# Altium PCB CH32V00x_Touch_Kit.PcbDoc
Units mil, origin at the board's own origin, x right, y up, seen from the top; angles counter-clockwise.
Board outline 2598.43 x 2007.87 mil, 2 copper layers (Top Layer, Bottom Layer); 37 components, 40 nets, 148 pads, 271 vias.
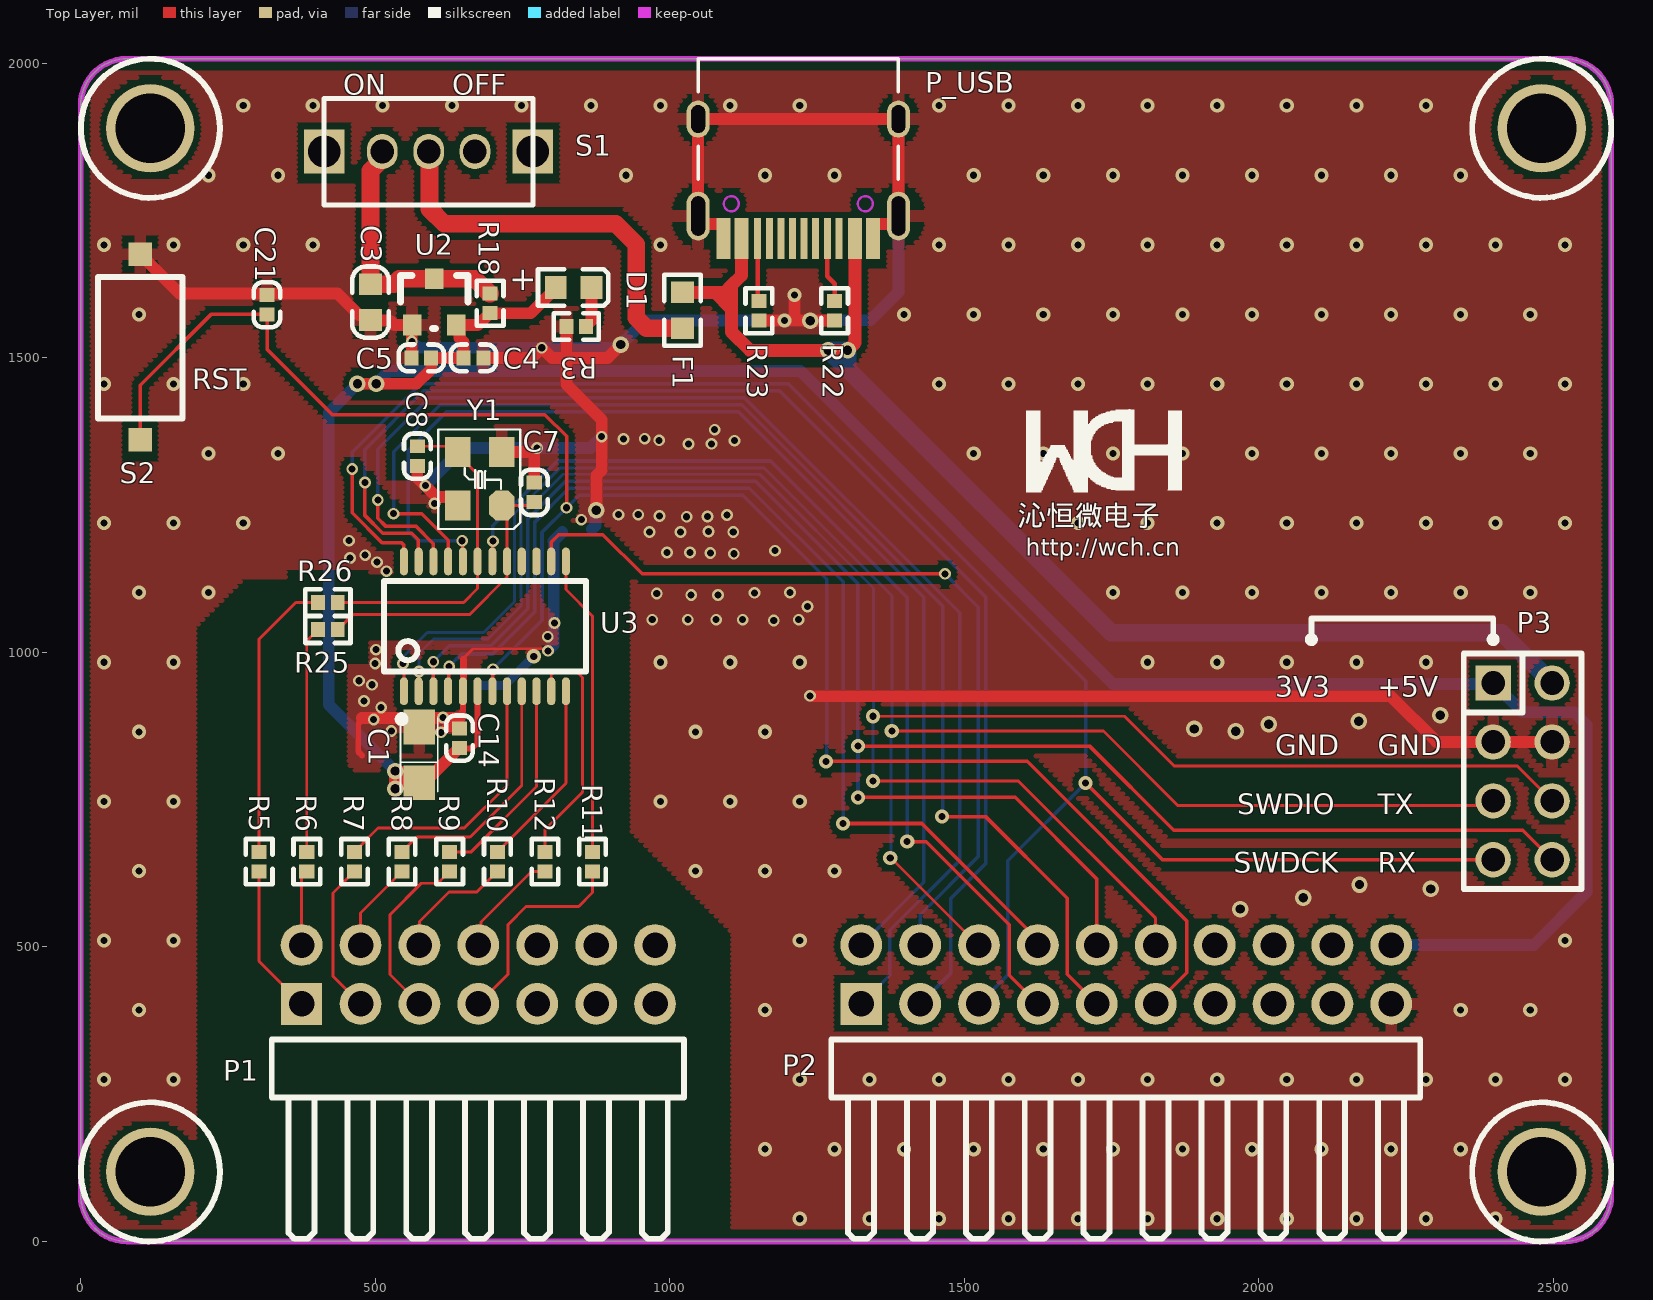
[diagram p0: Top Layer view]
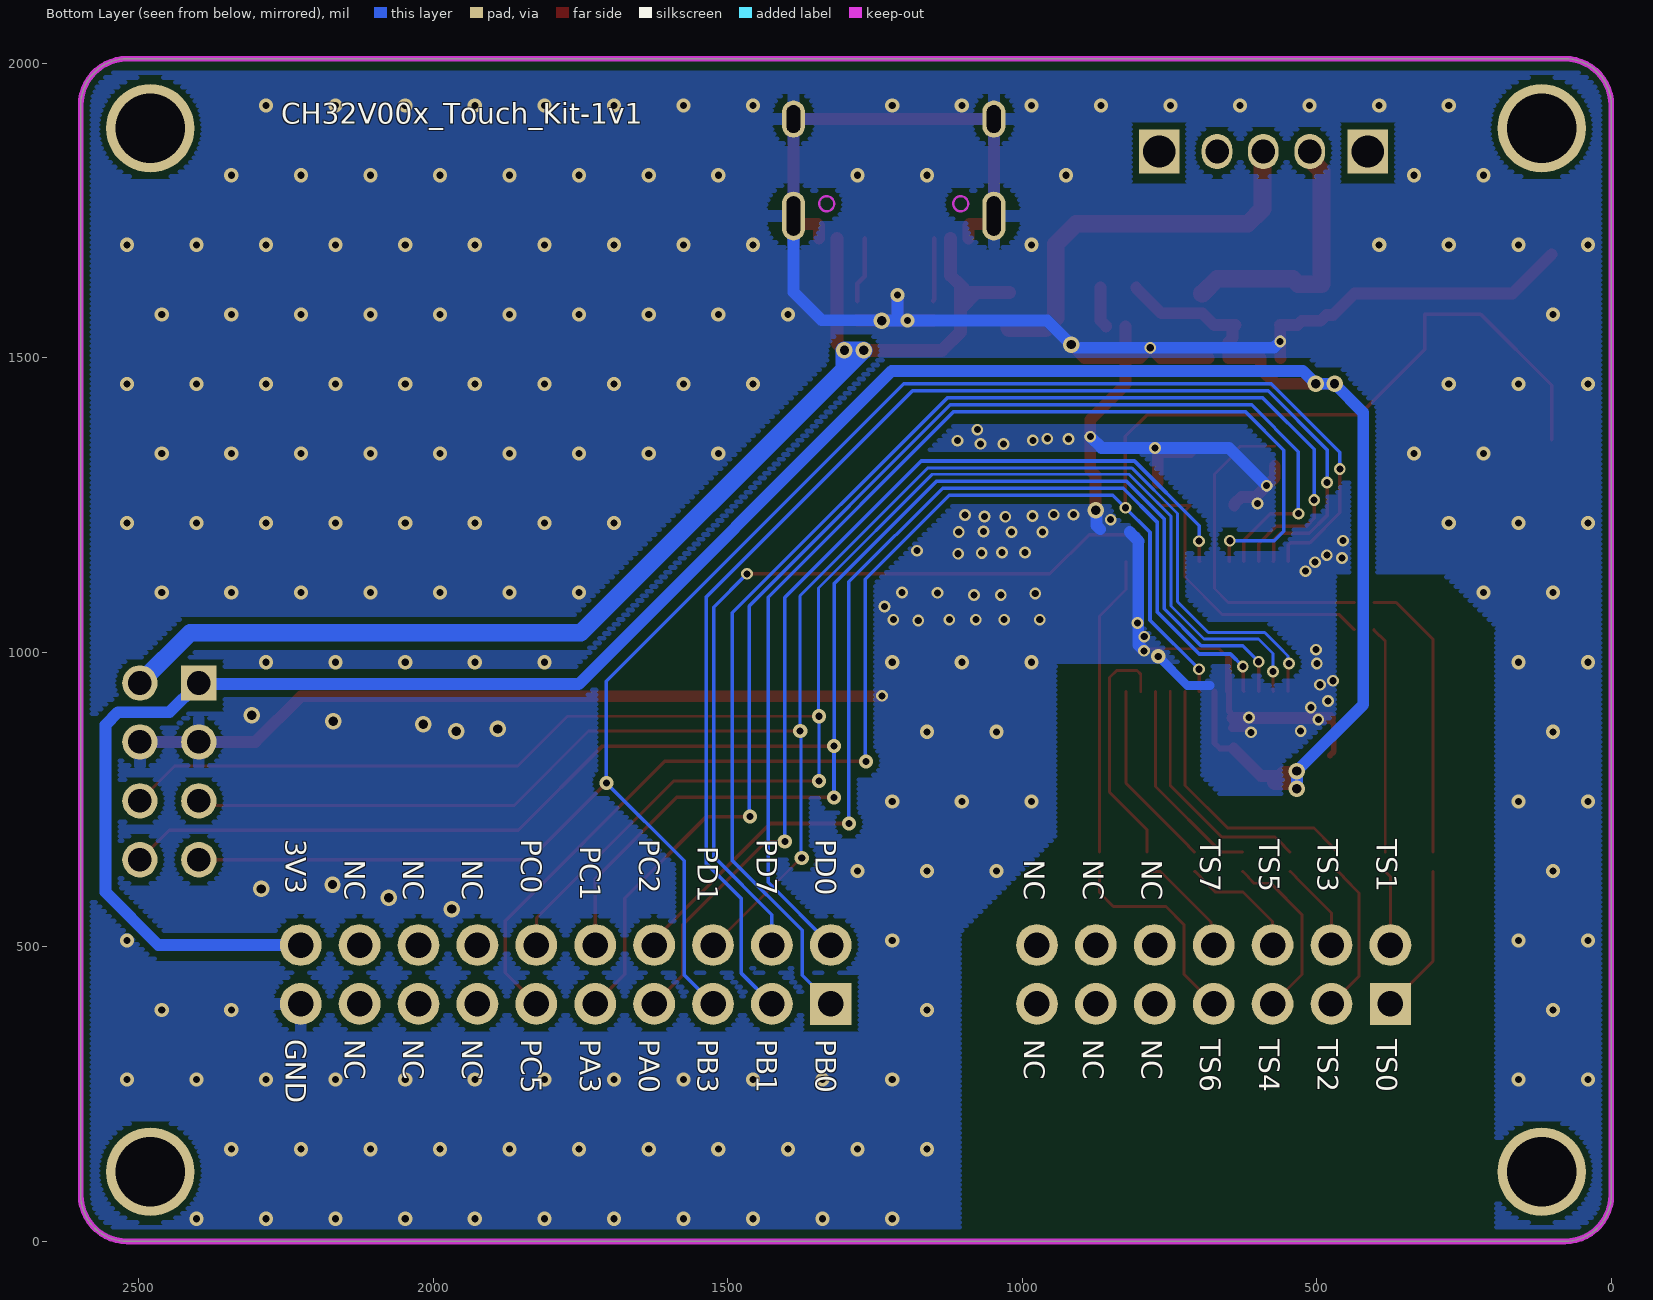
[diagram p1: Bottom Layer view, seen from below]

## Layer stack, top to bottom
Top Solder: solder mask 0.4, Solder Resist, Dk 3.5
Top Layer: signal copper 1.4
Dielectric 1: dielectric 12.6, FR-4, Dk 4.8
Bottom Layer: signal copper 1.4
Bottom Solder: solder mask 0.4, Solder Resist, Dk 3.5

## Board outline
0,78.74 ccw(c78.74,78.74) 78.74,0 2519.69,0 ccw(c2519.69,78.74) 2598.43,78.74 2598.43,1929.13 ccw(c2519.69,1929.13) 2519.69,2007.87 78.74,2007.87 ccw(c78.74,1929.13) 0,1929.13

## Design rules (kind name [scope] priority, off if disabled: settings)
Clearance Clearance_2 [InNetClass('Net Class1') vs InPolygon] p1: gap=39.37 ignorepadtopadclearanceinfootprint=FALSE
Clearance Clearance_1 [InPolygon] p2: gap=10 ignorepadtopadclearanceinfootprint=FALSE
Clearance [All] p3: gap=6 ignorepadtopadclearanceinfootprint=FALSE except(8: Arc-Via Track-Via SMDPad-Via THPad-Via Via-Via Via-Fill Via-Poly Via-Region Via-Hole)
ComponentClearance [All] p1 off: gap=10 collisioncheckmode=3 verticalgap=10 showdistances=FALSE
DiffPairsRouting [All] p1: maxlimit=10 minlimit=7 mostfreqgap=8 toplayer_minwidth=6 toplayer_maxwidth=15 toplayer_prefwidth=8 bottomlayer_minwidth=6 bottomlayer_maxwidth=15 bottomlayer_prefwidth=8 maxuncoupledlength=500
MinimumSolderMaskSliver [All] p1 off: minsoldermaskwidth=10
PolygonConnect PolygonConnect_1 [IsVia] p1: connectstyle=Direct reliefconductorwidth=10 reliefentries=4 polygonreliefangle="90 Angle" airgapwidth=10
PolygonConnect [All] p2: connectstyle=Relief reliefconductorwidth=20 reliefentries=4 polygonreliefangle="90 Angle" airgapwidth=10
RoutingVias [All] p1: holewidth=16 width=28 viastyle="Through Hole" minholewidth=12 minwidth=20 maxholewidth=28 maxwidth=50
SilkToSilkClearance [All] p1 off: silktosilkclearance=10
SilkToSolderMaskClearance [IsPad] p1 off: minsilkscreentomaskgap=10 clearancetoexposedcopper=TRUE
SolderMaskExpansion [All] p1: expansion=2 istentingtop=FALSE
Width [All] p1: maxlimit=100 minlimit=5 preferedwidth=10
25 further rules are at their usual default settings.

## Classes and differential pairs
net class "Net Class1": PA1 PA2 PC4 PD2 PD3 PD4 PD5 PD6 TS0 TS1 TS2 TS3 TS4 TS5 TS6 TS7 XI XO
component class CH32V00x_Touch_Kit-1v1: C1 C3 C4 C5 C7 C8 C14 C21 D1 F1 P1 P2 P3 P_USB R3 R5 R6 R7 R8 R9 R10 R11 R12 R18 R22 R23 R25 R26 S1 S2 U2 U3 Y1

## Components (designator, comment, footprint, x,y, rotation, side; value= is the part's Value field where it differs from the comment)
C1 "10uF" CASE-A_3216 574.64,826.05 r90 top
C3 "10uF" 0603_C 492,1625 r270 top
C4 "2.2uF" 0402_C 650,1500 r90 top
C5 "0.1uF" 0402_C 595,1500 r270 top
C7 "NC(22pF)" 0402_C 770,1288.46 r0 top
C8 "NC(22pF)" 0402_C 571.38,1316.54 r180 top
C14 "0.1uF" 0402_C 643.04,871.13 r0 top value=15pF
C21 "0.1uF" 0402_C 316.22,1606.93 r0 top
D1 "power" 0603+ 806.48,1619.59 r0 top
F1 "500mA" 0603 1021.64,1611.07 r270 top
P1 "Header 7X2" HDR-TH_14P-P2.54-H-M-R2-C10-S2.54 375,403.22 r0 top
P2 "Header 10X2" HDR-TH_20P-P2.54-H-M-R2-C10-S2.54 1775,453.22 r0 top
P3 "Header 4X2" IDC8-2.54mm 2397.99,947.99 r0 top
P_USB "TYPE-C" TYPE-C-Receptacle-2.0 1218.24,1702.67 r180 top
R3 "1K" 0402 857.98,1553.27 r180 top
R5 "0Ω(560Ω)" 0402 302.87,661.46 r270 top
R6 "0Ω(560Ω)" 0402 383.74,628 r90 top
R7 "0Ω(560Ω)" 0402 464.62,661.46 r270 top
R8 "0Ω(560Ω)" 0402 545.5,628 r90 top
R9 "0Ω(560Ω)" 0402 626.37,661.46 r270 top
R10 "0Ω(560Ω)" 0402 707.25,628 r90 top
R11 "0Ω(560Ω)" 0402 869,661.46 r270 top
R12 "0Ω(560Ω)" 0402 788.12,628 r90 top
R18 "NC(0R)" 0402 695,1575.94 r90 top
R22 "5.1K" 0402 1280,1596.74 r270 top
R23 "5.1K" 0402 1151.24,1596.74 r270 top
R25 "0R" 0402 436.27,1038.57 r180 top
R26 "0R" 0402 436.27,1084.66 r180 top
S1 "SW SPDT" SW1 590.55,1850.39 r0 top
S2 "RST" SMD_6.1x3.65x2.5mm-KEY 100.98,1675.94 r270 top
U2 "6219P33M" SOT-23 600,1595 r0 top
U3 "CH32V006E8R6" QSOP24 548.76,933.91 r0 top
Y1 "NC(24MHz)" XT3225 714.8,1249.45 r90 top
? "Comment" HOLE 118.11,118.11 r0 top
? "Comment" HOLE 2480.31,118.11 r0 top
? "Comment" HOLE 2480.31,1889.76 r0 top
? "Comment" HOLE 118.11,1889.76 r0 top

## Footprints (in the part's own frame and the unit in brackets; to place one, negate y for a bottom-side part, rotate by r counter-clockwise, add the part's x,y. Pads: shape width x height; smd on the part's side, far side on the other; paste and mask are expansions set on the pad)
0402 [mm]
  rect 0.6x0.65 smd mask+0.051: 1(0,0) 2(0.85,0)
  silkscreen extent -0.55,-0.58 1.4,0.57
0402_C [mm]
  rect 0.65x0.6 smd mask+0.051: 1(0,0) 2(0,-0.85)
  silkscreen extent -0.58,-1.4 0.57,0.55
0603 [mm]
  rect 0.93x0.98 smd: 1(0,0) 2(1.54,0)
  silkscreen extent -0.76,-0.79 2.3,0.79
0603+ [mm]
  rect 0.93x0.98 smd: 1(0,0) 2(1.54,0)
  silkscreen extent -0.76,-0.79 2.27,0.79
0603_C [mm]
  rect 0.93x0.98 smd mask+0.051: 1(0,0) 2(1.54,0)
  silkscreen extent -0.76,-0.79 2.31,0.79
CASE-A_3216 [mil]
  rect 59.05x53.5 smd: 1(-47.24,0) 2(47.24,0)
  silkscreen extent -63,-32 63,32
HDR-TH_14P-P2.54-H-M-R2-C10-S2.54 [mm]
  rect 1.778x1.8 hole 1.1: 1(0,0)
  round 1.8 hole 1.1: 2(0,2.54) 3(2.54,0) 4(2.54,2.54) 5(5.08,0) 6(5.08,2.54) 7(7.62,0) 8(7.62,2.54) 9(10.16,0) 10(10.16,2.54) 11(12.7,0) 12(12.7,2.54) 13(15.24,0) 14(15.24,2.54)
  silkscreen extent -1.29,-10.13 16.49,-1.54
HDR-TH_20P-P2.54-H-M-R2-C10-S2.54 [mm]
  rect 1.778x1.8 hole 1.1: 1(-11.43,-1.27)
  round 1.8 hole 1.1: 2(-11.43,1.27) 3(-8.89,-1.27) 4(-8.89,1.27) 5(-6.35,-1.27) 6(-6.35,1.27) 7(-3.81,-1.27) 8(-3.81,1.27) 9(-1.27,-1.27) 10(-1.27,1.27) 11(1.27,-1.27) 12(1.27,1.27) 13(3.81,-1.27) 14(3.81,1.27) 15(6.35,-1.27) 16(6.35,1.27) 17(8.89,-1.27) 18(8.89,1.27) 19(11.43,-1.27) 20(11.43,1.27)
  silkscreen extent -12.72,-11.4 12.68,-2.81
HOLE [mm]
  round 3.81 hole 3: 0(0,0)
  silkscreen extent -3,-3 3,3
IDC8-2.54mm [mil]
  rect 60x60 hole 40: 1(0,0)
  round 60 hole 40: 2(100,0) 3(0,-100) 4(100,-100) 5(0,-200) 6(100,-200) 7(0,-300) 8(100,-300)
  silkscreen extent -50,-350 150,50
QSOP24 [mm]
  oval 0.35x1.2 smd mask+0.051: 1(0,0) 2(0.635,0) 3(1.27,0) 4(1.905,0) 5(2.54,0) 6(3.175,0) 7(3.81,0) 8(4.445,0) 9(5.08,0) 10(5.715,0) 11(6.35,0) 12(6.985,0) 13(6.985,5.6) 14(6.35,5.6) 15(5.715,5.6) 16(5.08,5.6) 17(4.445,5.6) 18(3.81,5.6) 19(3.175,5.6) 20(2.54,5.6) 21(1.905,5.6) 22(1.27,5.6) 23(0.635,5.6) 24(0,5.6)
  silkscreen extent -0.86,-1.35 7.84,4.75
SMD_6.1x3.65x2.5mm-KEY [mm]
  rect 1x1 smd: 1(0,0) 2(8,0)
  silkscreen extent 0.98,-1.83 7.08,1.83
SOT-23 [mm]
  rect 0.8x0.9 smd: 1(-0.95,-1) 2(0.95,-1) 3(0,1)
  silkscreen extent -1.46,-1.14 1.46,1.15
SW1 [mm]
  rect 1.75x1.9 hole 1.4: 0(-4.5,0) 0(4.5,0)
  oval 1.321x1.524 hole 1.016: 1(0,0) 2(-2,0) 3(2,0)
  silkscreen extent -4.51,-2.31 4.5,2.29
TYPE-C-Receptacle-2.0 [mm]
  oval 1x2.1 hole 0.6 slot 1.7 at 90 deg: 0(-4.32,-0.97) 0(4.32,-0.97)
  oval 1x1.6 hole 0.6 slot 1.2 at 90 deg: 0(-4.32,-5.15) 0(4.32,-5.15)
  rect 0.6x1.75 smd mask+0.051: A1(-3.225,0) A4(-2.45,0) B1(3.225,0) B4(2.45,0)
  rect 0.3x1.75 smd mask+0.051: A5(-1.25,0) A6(-0.25,0) A7(0.25,0) A8(1.25,0) B5(1.75,0) B6(0.75,0) B7(-0.75,0) B8(-1.75,0)
  Keep-Out Layer circle w0.1: c-2.89,-1.5 r0.325
  Keep-Out Layer circle w0.1: c2.89,-1.5 r0.325
  silkscreen extent -4.32,-7.75 4.32,-2.55
XT3225 [mm]
  oct 1.3x1.1 smd: 1(0,0)
  rect 1.3x1.1 smd: 2(2.3,0) 3(2.3,1.9) 4(0,1.9)
  silkscreen extent -1.02,-0.8 3.27,2.74

## Part data
C1: library part T-A/4.7uF/16V
C3 C4 C5 C7 C8 C21: library part CAP, "Capacitor"
C14: library part Cap, "Capacitor", LatestRevisionDate=17-Jul-2002, LatestRevisionNote="Re-released for DXP Platform.", PackageReference=RAD-0.3, Published=8-Jun-2000, Publisher="Altium Limited"
D1: library part LED0, "Typical INFRARED GaAs LED", LatestRevisionDate=08-Jul-2005, LatestRevisionNote="Mech Layer 1 removed.", PackageDescription="LED; 2 Leads", PackageReference=LED-0, Published=8-Jun-2000, Publisher="Altium Limited"
F1: library part FUSE1, "Fuse"
P1: "Header, 7-Pin, Dual row", LatestRevisionDate=17-Jul-2002, LatestRevisionNote="Re-released for DXP Platform.", Publisher="Altium Limited"
P2: "Header, 10-Pin, Dual row", LatestRevisionDate=17-Jul-2002, LatestRevisionNote="Re-released for DXP Platform.", Publisher="Altium Limited"
P3: "Header, 4-Pin, Dual row", LatestRevisionDate=17-Jul-2002, LatestRevisionNote="Re-released for DXP Platform.", Publisher="Altium Limited"
P_USB: library part TYPE-C1
R3 R5 R6 R7 R8 R9 R10 R11 R12: library part RES
R18 R22 R23: library part Res2, "Resistor"
  R18: LatestRevisionDate=17-Jul-2002, LatestRevisionNote="Re-released for DXP Platform.", PackageReference=AXIAL-0.4, Published=8-Jun-2000, Publisher="Altium Limited"
R25 R26: library part "Res Semi", "Semiconductor Resistor", LatestRevisionDate=17-Jul-2002, LatestRevisionNote="Re-released for DXP Platform.", PackageReference=AXIAL-0.5, Published=8-Jun-2000, Publisher="Altium Limited"
S2: library part SW-PB, "Switch", LatestRevisionDate=17-Jul-2002, LatestRevisionNote="Re-released for DXP Platform.", PackageDescription="Switch; 2 Leads", PackageReference=SPST-2, Published=24-Mar-1999, Publisher="Altium Limited"
U3: "RISC-V MCU, 48MHz, ADC/OPA/CMP/2*UART/I2C/SPI"
Y1: library part XTAL, "Crystal Oscillator", LatestRevisionDate=17-Jul-2002, LatestRevisionNote="Re-released for DXP Platform.", PackageDescription="Crystal, Thru-Hole; 2 Leads; Body 3.1 x 8.2 mm (Dia.xH)", PackageReference=R38, Published=8-Jun-2000, Publisher="Altium Limited"

## Via types
v1: diameter 24, hole 12, Top Layer to Bottom Layer, tented both sides, 180 vias
v2: diameter 20, hole 12, Top Layer to Bottom Layer, tented both sides, 73 vias
v3: diameter 28, hole 16, Top Layer to Bottom Layer, tented both sides, 18 vias

## Nets (pads, with @x,y where several pads share a name; then routed paths per layer and width w, separated by ;. In a path a pad name is that pad's centre, name@x,y a point inside that pad or via, vN(x,y) a via of type N, cw(c..) or ccw(c..) an arc to the next point about the centre after c; other vN are vias at no path point)
3V3: C1.1 C4.1 C5.1 C14.2 D1.1 P2.20 P3.1 R18.1 U2.2 U3.6 | length 4586
  Top Layer w10: C14.2@634.76,836.68 641.07,836.68 664.26,836.68 673.76,846.18 U3.6
  Top Layer w20: v3(469.85,1455.94) 569.98,1455.94 595,1480.96 C5.1 C4.1 650,1526.8 643.15,1533.65 643.15,1549.88 U2.2 673.7,1555.63 694.02,1575.94 R18.1 763.82,1575.94 806.48,1618.6 D1.1 ; v3(533.67,798.63) 535.2,797.1 557.89,797.1 564.06,790.93 C1.1@564.06,790.07 ; v3@535.2,777.04 v3@533.67,775.51 ; C1.1 571.87,776.04 535.2,776.04 533.67,774.51 v3@533.67,775.51 ; C14.2@641.07,836.68 594.46,790.07 C1.1@564.06,790.07 ; v3@533.67,775.51 533.67,790.07 C1.1@564.06,790.07
  Bottom Layer w20: v3(533.67,768.51) v3(533.67,798.63) 420.99,911.32 420.99,1407.07 v3(469.85,1455.94) 470.18,1456.27 501.48,1456.27 v3(501.88,1455.87) 523.92,1477.91 1221.59,1477.91 1753.19,946.31 P3.1@2399.68,946.31 ; P2.20 2466.75,503.22 2556.29,592.77 2556.29,877.32 2535.39,898.23 2447.76,898.23 P3.1@2399.68,946.31 ; P3.1 P3.1@2399.68,946.31 ; P3.1@2412.5,946.31 P3.1@2399.68,946.31
+5V: F1.1 P3.2 P_USB.A4 P_USB.B4 | length 2223.9
  Top Layer w22: F1.1 1077.09,1611.07 ; P_USB.B4 1121.78,1639.92 1104.62,1622.76 ; P_USB.A4 1314.69,1525.71 v3(1301.81,1512.83) 1136.11,1512.83 1104.62,1544.32 1104.62,1583.54 ; 1077.09,1611.07 1092.93,1611.07 1104.62,1622.76 ; 1077.09,1611.07 1104.62,1583.54 ; 1104.62,1583.54 1104.62,1622.76
  Bottom Layer w30: v3@1269.43,1512.51 v3@1270.08,1512.51 ; P3.2 2412.73,1033.26 1749.33,1033.26 1316.97,1465.62 1301.81,1480.79 ; v3@1270.08,1512.51 1301.81,1480.79 ; v3@1270.08,1512.51 1301.49,1512.51 v3(1301.81,1512.83) 1301.81,1480.79
  other v3: 1269.43,1512.83
GND: C1.2 C3.2 C4.2 C5.2 C7.1 C8.1 C14.1 C21.1 P2.19 P3.3 P3.4 P_USB.0 P_USB.A1 P_USB.B1 R3.2 R22.2 R23.2 S2.1 U2.1 U3.5 Y1.2 Y1.4 | length 5936.4
  Top Layer w5: 648.76,989.1 665.83,1006.17 792.83,1006.17 v2@794.34,1004.66
  Top Layer w10: 477.09,884.52 471.23,878.67 471.23,831.53 477.76,825 ; 620.4,871.13 620.4,871.62 ; C14.1 643.04,894.18 648.76,899.9 U3.5
  Top Layer w12: U3.5@649.76,933.91 649.76,989.1
  Top Layer w15: 620.4,872.13 C14.1@643.04,872.13
  Top Layer w20: S2.1 167.52,1609.41 435.83,1609.41 472.56,1572.68 483.69,1572.68 493.18,1563.19 525.29,1563.19 532.85,1555.63 U2.1 562.07,1555.1 v2(562.07,1527.82) 562.07,1500.53 C5.2 ; 477.09,888.52 643.04,888.52 ; C8.1 571.38,1296.79 604.53,1263.65 628.35,1263.65 640,1251.99 Y1.4 ; C4.2 765.53,1500 v2(782.71,1517.17) 799.88,1500 820.33,1500 ; Y1.2 767.55,1340 v2@770,1342.45 ; C7.1 v2@770,1342.45 ; v2(774.63,1347.09) v2@770,1342.45 ; R3.2 824.52,1504.19 820.33,1500 ; v3(875.42,1241.34) 875.42,1300.32 884.48,1309.38 v2(884.48,1366.19) 884.48,1395.14 824.52,1455.11 824.52,1500 ; v3(917.12,1522.7) 894.41,1500 824.52,1500 ; P_USB.B1 1091.27,1725.31 1089.46,1727.12 1057.11,1727.12 1048.16,1736.07 1048.16,1740.86 1048.16,1905.43 1388.32,1905.43 1388.32,1740.86 1388.32,1736.07 1379.37,1727.12 1347.02,1727.12 1345.2,1725.31 P_USB.A1 ; R23.2 v1(1194.86,1563.28) 1214.17,1563.28 ; v1(1211.91,1606.61) 1211.91,1565.54 1214.17,1563.28 ; v2(1238.25,926.22) 1239.03,925.43 2224.35,925.43 2301.79,847.99 P3.3 P3.4 ; R22.2 v3(1238.47,1563.28) 1214.17,1563.28 ; 820.33,1500 824.52,1500
  Bottom Layer w15: 681.41,943.78 719.55,943.78 v1(769.13,993.36)
  Bottom Layer w20: v2(562.07,1527.82) 572.71,1517.17 909.42,1517.17 914.95,1522.7 v3(917.12,1522.7) 957.69,1563.28 v1(1194.86,1563.28) 1216.66,1563.28 ; v2(585.07,1283.1) 585.16,1283.1 649.15,1347.09 v2(774.63,1347.09) 865.37,1347.09 v2(884.48,1366.19) ; v2@794.34,1004.66 802.1,1012.41 ; 802.1,1188.76 817.57,1204.23 ; 803.1,1012.41 803.1,1188.76 ; 867.66,1209.02 873.89,1215.25 873.89,1239.81 v3(875.42,1241.34) ; v1(1211.91,1606.61) 1211.91,1568.03 1216.66,1563.28 ; P_USB.0@1388.32,1740.86 1388.32,1611.35 1340.78,1563.81 1239.01,1563.81 v3(1238.47,1563.28) 1216.66,1563.28
  other v1: 1220.75,38.42 1338.86,38.42 1456.97,38.42 1575.08,38.42 1693.19,38.42 1811.3,38.42 1929.41,38.42 2047.52,38.42 2165.63,38.42 2283.74,38.42 2401.85,38.42 1161.69,156.53 1279.8,156.53 1397.91,156.53 1516.02,156.53 1634.13,156.53 1752.24,156.53 1870.35,156.53 1988.46,156.53 2106.57,156.53 2224.68,156.53 2342.79,156.53 39.64,274.64 157.76,274.64 1220.75,274.64 1338.86,274.64 1456.97,274.64 1575.08,274.64 1693.19,274.64 1811.3,274.64 1929.41,274.64 2047.52,274.64 2165.63,274.64 2283.74,274.64 2401.85,274.64 2519.96,274.64 98.7,392.76 1161.69,392.76 2342.79,392.76 2460.9,392.76 39.64,510.87 157.76,510.87 1220.75,510.87 2519.96,510.87 98.7,628.98 1043.58,628.98 1161.69,628.98 1279.8,628.98 39.64,747.09 157.76,747.09 984.53,747.09 1102.64,747.09 1220.75,747.09 98.7,865.2 1043.58,865.2 1161.69,865.2 39.64,983.31 157.76,983.31 984.53,983.31 1102.64,983.31 1220.75,983.31 1811.3,983.31 1929.41,983.31 2047.52,983.31 2165.63,983.31 2283.74,983.31 98.7,1101.42 216.81,1101.42 1752.24,1101.42 1870.35,1101.42 1988.46,1101.42 2106.57,1101.42 2224.68,1101.42 2342.79,1101.42 2460.9,1101.42 39.64,1219.53 157.76,1219.53 275.87,1219.53 1693.19,1219.53 1811.3,1219.53 1929.41,1219.53 2047.52,1219.53 2165.63,1219.53 2283.74,1219.53 2401.85,1219.53 2519.96,1219.53 216.81,1337.64 334.92,1337.64 1516.02,1337.64 1634.13,1337.64 1752.24,1337.64 1870.35,1337.64 1988.46,1337.64 2106.57,1337.64 2224.68,1337.64 2342.79,1337.64 2460.9,1337.64 39.64,1455.75 157.76,1455.75 275.87,1455.75 1456.97,1455.75 1575.08,1455.75 1693.19,1455.75 1811.3,1455.75 1929.41,1455.75 2047.52,1455.75 2165.63,1455.75 2283.74,1455.75 2401.85,1455.75 2519.96,1455.75 98.7,1573.86 1397.91,1573.86 1516.02,1573.86 1634.13,1573.86 1752.24,1573.86 1870.35,1573.86 1988.46,1573.86 2106.57,1573.86 2224.68,1573.86 2342.79,1573.86 2460.9,1573.86 39.64,1691.97 157.76,1691.97 275.87,1691.97 393.98,1691.97 984.53,1691.97 1456.97,1691.97 1575.08,1691.97 1693.19,1691.97 1811.3,1691.97 1929.41,1691.97 2047.52,1691.97 2165.63,1691.97 2283.74,1691.97 2401.85,1691.97 2519.96,1691.97 216.81,1810.08 334.92,1810.08 925.47,1810.08 1161.69,1810.08 1279.8,1810.08 1516.02,1810.08 1634.13,1810.08 1752.24,1810.08 1870.35,1810.08 1988.46,1810.08 2106.57,1810.08 2224.68,1810.08 2342.79,1810.08 275.87,1928.19 393.98,1928.19 512.09,1928.19 630.2,1928.19 748.31,1928.19 866.42,1928.19 984.53,1928.19 1102.64,1928.19 1220.75,1928.19 1456.97,1928.19 1575.08,1928.19 1693.19,1928.19 1811.3,1928.19 1929.41,1928.19 2047.52,1928.19 2165.63,1928.19 2283.74,1928.19
  other v2: 611.76,864.28 527.24,866.71 497.39,885.88 614.9,889.33 510.04,906.24 481.05,917.61 494.55,945.11 472.56,951.86 499.9,981.08 793.34,1002.66 501.16,1004.65 792.89,1026.68 804.29,1049.7 1176.51,1054.22 970.22,1055.5 1030.63,1055.5 1078.83,1055.5 1123.82,1055.5 1218.93,1055.5 1233.71,1078 1036.41,1097.28 1082.04,1097.28 977.93,1099.85 1143.74,1101.13 1204.15,1101.77 518.88,1137.87 502.98,1153.23 457,1160.06 482.95,1165.07 1108.75,1167.47 1068.88,1168.62 995.5,1169.78 1034.21,1169.78 1178.67,1172.67 455.63,1189.65 965.79,1204.53 1018.26,1204.53 1065.6,1205.1 1107.81,1204.53 849.82,1225.32 1028.75,1230.24 1064.21,1230.75 982.5,1231.78 1097.1,1233.32 912.85,1233.76 946.54,1233.76 600.61,1252.66 1031.83,1353.57 1070.89,1354.09 1109.68,1359.48 982.01,1359.99 921.39,1362.23 957.44,1362.87 1076.26,1378.12
  other v3: 1968.38,564.32 2075.74,583.22 2291.96,598.34 2171,605.9 1960.79,865.99 1890.56,870 2016.97,878.03 2169.47,883.04 2307.92,893.07
NetD1_2: D1.2 R3.1 | length 70.1
  Top Layer w20: R3.1 857.98,1554.25 867.11,1563.38 D1.2
NetF1_2: F1.2 S1.1 | length 684.9
  Top Layer w30: S1.1 592.05,1848.9 592.05,1752.68 617.17,1727.55 908.27,1727.55 942.92,1692.9 942.92,1568.01 960.5,1550.44 F1.2
NetP_USB_A5: P_USB.A5 R22.1 | length 111.1
  Top Layer w8: P_USB.A5 1267.45,1638.45 1280,1625.9 R22.1
NetP_USB_B5: P_USB.B5 R23.1 | length 106.7
  Top Layer w8: P_USB.B5 1149.34,1598.64 R23.1
NRST: C21.2 P2.11 S2.2 U3.7 | length 3178.9
  Top Layer w6: S2.2 100.98,1453.51 221.26,1573.78 316.89,1573.78 316.89,1514.17 427.31,1403.75 787.89,1403.75 824.91,1366.73 v2(824.91,1245.6) ; U3.7 699.26,934.41 699.26,970.93 v2(699.77,971.43) ; v1(1265.19,814.94) 1606.76,814.94 1877.65,544.04 1877.65,455.88 P2.11
  Bottom Layer w6: v2(699.77,971.43) 783.1,1054.76 783.1,1203.78 v2(824.91,1245.6) 846.23,1266.91 1123.92,1266.91 1266.68,1124.16 1266.68,816.42 v1(1265.19,814.94)
PA0: P2.7 U3.18 | length 1707
  Top Layer w6: U3.18 699.25,1154.87 699.25,1188.31 v2(699.73,1188.8) ; v1(1403.09,678.7) 1435.32,678.7 1576.14,537.88 1576.14,452.08 P2.7
  Bottom Layer w6: v2(699.73,1188.8) 699.73,1215.17 809.48,1324.91 1171.51,1324.91 1403.29,1093.13 1403.29,678.9 v1(1403.09,678.7)
PA1: R6.2 R25.2 | length 385.6
  Top Layer w5: R6.2 383.74,1019.5 392.51,1028.27 393.5,1028.27 402.81,1037.58 R25.2
PA2: R5.1 R26.2 | length 486.6
  Top Layer w5: R5.1 302.87,1022.36 365.17,1084.66 R26.2
PA3: P2.9 U3.21 | length 2187.8
  Top Layer w6: v2(531.17,1235.49) 578.96,1235.49 623.76,1190.69 U3.21 ; v1(1462.12,721.33) 1536.11,721.33 1674.81,582.63 1674.81,453.41 P2.9
  Bottom Layer w6: v2(531.17,1235.49) 531.17,1340.82 610.59,1420.24 1122.02,1420.24 1463.55,1078.7 1463.55,722.75 v1(1462.12,721.33)
PA4: U3.15
PA5: U3.16
PB0: P2.1 U3.22 | length 2167.8
  Top Layer w6: v2(504.37,1258.73) 504.37,1227.54 517.42,1214.49 568.83,1214.49 598.76,1184.56 U3.22
  Bottom Layer w6: v2(504.37,1258.73) 504.37,1344.62 591.99,1432.24 1126.99,1432.24 1492.11,1067.12 1492.11,646.69 1373.49,528.07 1373.49,452.15 1325,403.65 P2.1
PB1: P2.3 U3.23 | length 2234.3
  Top Layer w6: v2(482.52,1288.24) 482.52,1232.42 512.45,1202.49 561.79,1202.49 572.88,1191.41 572.88,1155.26 U3.23
  Bottom Layer w6: v2(482.52,1288.24) 482.52,1344.28 582.48,1444.24 1186.21,1444.24 1536.83,1093.62 1536.83,641.77 1476.66,581.6 1476.66,454.88 P2.3
PB3: P2.5 P3.7 U3.24 | length 3112.5
  Top Layer w6: v2(460.89,1311.18) 460.89,1237.08 511.58,1186.39 544.57,1186.39 548.76,1182.2 U3.24 ; v1(1706.12,778.37) 1836.5,647.99 P3.7
  Bottom Layer w6: v2(460.89,1311.18) 460.89,1339.62 577.51,1456.24 1201.02,1456.24 1706.12,951.14 v1(1706.12,778.37) 1574.03,646.29 1574.03,452.25 P2.5
PC0: P2.12 P3.6 U3.2 | length 3293.4
  Top Layer w5: U3.2 574.12,934.26 574.12,967.01 v2(574.48,967.37) ; v1(1345.18,781.43) 1592.16,781.43 1825,548.59 P2.12 ; v1(1345.3,891.63) 1771.96,891.63 1856.84,806.76 2439.23,806.76 P3.6
  Bottom Layer w5: v2(574.48,967.37) 574.48,998.04 599.09,1022.65 691.64,1022.65 747.6,1078.61 747.6,1231.21 818.8,1302.41 1152.8,1302.41 1345.94,1109.28 1345.94,892.27 v1@1345.21,891.54 ; v1(1345.18,781.43) 1345.24,781.49 v1@1345.24,891.51
PC1: P2.10 P3.8 U3.3 | length 3255.8
  Top Layer w6: v2(598.6,984.16) 598.68,984.08 598.68,933.99 U3.3 ; v1(1319.53,841.02) 1712.72,841.02 1855.68,698.05 2447.93,698.05 P3.8 ; v1(1319.62,753.94) 1586.42,753.94 1725,615.36 P2.10
  Bottom Layer w6: v2(598.6,984.16) 625.59,1011.15 696.41,1011.15 759.1,1073.84 759.1,1226.45 823.56,1290.91 1144.98,1290.91 1319.53,1116.37 v1(1319.53,841.02) ; v1(1319.62,753.94) 1319.57,753.98 v1@1319.57,840.97 ; v1(1319.53,841.02) v1@1319.57,840.97
PC2: P2.8 U3.4 | length 1824.2
  Top Layer w6: U3.4 624.63,934.77 624.63,975.4 v2(625.5,976.27) ; v1(1294.34,709.49) 1427.57,709.49 1625,512.06 P2.8
  Bottom Layer w6: v2(625.5,976.27) 646.53,997.3 699.59,997.3 771.1,1068.8 771.1,1221.48 828.53,1278.91 1135.19,1278.91 1294.34,1119.77 v1(1294.34,709.49)
PC4: R7.1 U3.8 | length 466.2
  Top Layer w5: R7.1 465.61,661.46 474.92,670.78 474.92,671.76 504.81,701.65 651.29,701.65 723.76,774.12 U3.8
PD0: P2.2 U3.20 | length 1938.8
  Top Layer w6: v2(647.58,1189.53) 648.17,1188.94 648.17,1154.97 U3.20
  Bottom Layer w6: v2(647.58,1189.53) 572.34,1189.53 556.02,1205.85 556.02,1343.48 620.78,1408.24 1117.05,1408.24 1431.41,1093.88 1431.41,609.63 P2.2
PD1: P2.6 P3.5 U3.1 | length 2934.8
  Top Layer w5: v2(547.09,981.02) 548.76,979.35 U3.1 ; v1(1374.29,650.95) 1375.78,650.95 1523.51,503.22 P2.6 ; v1(1376.97,866.48) 1736.15,866.48 1862.21,740.42 2390.42,740.42 P3.5
  Bottom Layer w5: v2(547.09,981.02) 548.81,982.74 548.81,994.04 564.19,1009.42 588.42,1033.65 684.16,1033.65 736.6,1086.09 736.6,1235.77 814.24,1313.41 1160.01,1313.41 1377.44,1095.99 1377.44,866.95 1375.63,865.14 1375.63,652.29 v1(1374.29,650.95)
PD2: R8.2 U3.9 | length 410.2
  Top Layer w5: R8.2 546.48,661.46 555.79,670.78 555.79,671.76 570.69,686.66 661.21,686.66 748.76,774.21 U3.9
PD3: R9.1 U3.10 | length 355
  Top Layer w5: R9.1 663.11,661.46 773.76,772.11 U3.10
PD4: R12.2 U3.11 | length 412.1
  Top Layer w5: R12.2 788.12,699 851.84,762.72 851.84,957.34 839.7,969.48 805.28,969.48 798.76,962.96 U3.11
PD5: R10.2 U3.12 | length 321.3
  Top Layer w5: R10.2 708.23,661.46 717.54,670.78 717.54,671.76 823.76,777.98 U3.12
PD6: R11.1 U3.13 | length 511.7
  Top Layer w5: U3.13 823.76,1106.69 869,1061.45 R11.1
PD7: P2.4 U3.14 | length 1429
  Top Layer w6: U3.14 798.76,1187.39 811.4,1200.03 886.51,1200.03 953.15,1133.39 v2(1467.36,1133.39)
  Bottom Layer w6: P2.4 1425,554.66 1523.84,653.5 1523.84,1076.91 v2(1467.36,1133.39)
TS0: P1.1 R5.2 | length 254.7
  Top Layer w5: R5.2 302.87,475.78 375,403.65 P1.1
TS1: P1.2 R6.1 | length 128.4
  Top Layer w5: P1.2 375,619.26 R6.1
TS2: P1.3 R7.2 | length 259.9
  Top Layer w5: R7.2 463.64,628 454.33,618.69 454.33,617.7 428.16,591.54 428.16,450.06 P1.3
TS3: P1.4 R8.1 | length 154.6
  Top Layer w5: P1.4 475,557.5 535.2,617.7 535.2,618.69 544.51,628 R8.1
TS4: P1.5 R9.2 | length 304.6
  Top Layer w5: P1.5 524.93,453.29 524.93,554.71 578.26,608.03 606.41,608.03 616.08,617.7 616.08,618.69 625.39,628 R9.2
TS5: P1.6 R10.1 | length 207.8
  Top Layer w5: P1.6 575,542.95 625.21,593.15 672.4,593.15 696.95,617.7 696.95,618.69 706.26,628 R10.1
TS6: P1.7 R11.2 | length 357.4
  Top Layer w5: P1.7 725.73,453.95 725.73,538.18 756.06,568.51 845.33,568.51 869,592.18 R11.2
TS7: P1.8 R12.1 | length 185.1
  Top Layer w5: P1.8 679.35,507.57 679.35,542.15 765.19,628 R12.1
V5V: C3.1 R18.2 S1.2 U2.3 | length 450.8
  Top Layer w30: S1.2 511.81,1837.73 492,1817.92 C3.1 531.56,1625 540.93,1634.37 U2.3 669.06,1634.37 694.02,1609.41 R18.2
XI: C7.2 R25.1 U3.17 Y1.1 | length 507.3
  Top Layer w5: R25.1 461.75,1064.04 659.97,1064.04 723.76,1127.83 U3.17 723.44,1154.69 723.44,1240.81 Y1.1 764.45,1249.45 C7.2
XO: C8.2 R26.1 U3.19 Y1.3 | length 565.7
  Top Layer w5: R26.1 650.07,1084.66 673.76,1108.36 U3.19 673.76,1302.3 640,1336.06 Y1.3 630,1350 C8.2
pads on no net: ?.0 P1.9 P1.10 P1.11 P1.12 P1.13 P1.14 P2.13 P2.14 P2.15 P2.16 P2.17 P2.18 P_USB.A6 P_USB.A7 P_USB.A8 P_USB.B6 P_USB.B7 P_USB.B8 S1.0 S1.3

## Polygon pours and split planes (outlines as drawn)
GND on Top Layer "GND" (hatched Horizontal grid 8 track 8, remove dead copper, pour order 0): 0,0 0,2007.87 2598.43,2007.87 2598.43,0 2519.69,0
GND on Bottom Layer "GND" (hatched Horizontal grid 8 track 8, remove dead copper, pour order 1): 0,0 2598.43,0 2598.43,2007.87 0,2007.87

## Keep-outs
Keep-Out Layer:
  the board outline again, w10

## Other copper
Top Layer:
  pour cut-out: 198.16,740.39 198.16,1040.29 280.66,1122.78 644.85,1122.78 646.75,1120.88 660.27,1134.4 660.27,1202 668.1,1209.83 725.74,1209.83 735.7,1199.87 735.7,1083.88 686.14,1034.32 499.34,1034.32 450.72,985.71 450.72,808.14 469.05,789.81 469.05,740.67
  pour cut-out: 706.79,963.75 706.79,852.82 645.49,791.52 222.76,791.52 198.16,766.92 198.16,-0.6 199.82,-2.26 1101.54,-2.26 1101.72,-2.08 1101.72,522.33 931.36,692.69 931.36,1162.53 895.94,1197.95 819.46,1197.95 812.62,1191.12 812.62,1003.94 787.11,978.42 721.46,978.42
Bottom Layer:
  pour cut-out: 465.1,1125.82 465.1,795.25 504.82,755.52 666.66,755.52 698.76,787.62 698.76,955.72 721.87,978.83 934.62,978.83 939.98,973.46 939.98,684.07 1101.72,522.33 1101.72,-2.08 199.64,-2.08 198.99,-1.43 198.99,1039.46 198.16,1040.29 285.07,1127.19 453.15,1127.19 465.1,1127.19

## Silkscreen, mask and mechanical layers (free items; w line width, h text height)
Top Overlay:
  drawing of 6 lines, arcs and shapes, not listed
  text "ON" at 445.68,1946.55 h35
  text "OFF" at 630.68,1946.55 h35
  text "沁恒微电子" at 1591.15,1202.92 h60
  text "http://wch.cn" at 1604.46,1153.84 h50
  text "3V3" at 2027.55,924.92 h35
  text "+5V" at 2202.27,924.92 h35
  text "GND" at 2027.55,825.19 h35
  text "GND" at 2202.27,825.19 h35
  text "SWDIO" at 1963.4,725.46 h35
  text "TX" at 2202.27,725.46 h35
  text "SWDCK" at 1957.57,625.74 h35
  text "RX" at 2202.27,625.74 h35
Bottom Overlay:
  text "CH32V00x_Touch_Kit-1v1" at 2258.37,1897.57 h35
  text "TS1" at 398.4,682.67 h35 r90
  text "TS3" at 498.09,682.67 h35 r90
  text "TS5" at 597.77,682.67 h35 r90
  text "TS7" at 697.46,682.67 h35 r90
  text "PD0" at 1350.68,682.67 h35 r90
  text "PD7" at 1450.66,682.67 h35 r90
  text "PC2" at 1650.61,682.67 h35 r90
  text "PC0" at 1850.57,682.67 h35 r90
  text "3V3" at 2250.48,682.67 h35 r90
  text "PD1" at 1550.63,671.01 h35 r90
  text "PC1" at 1750.59,671.01 h35 r90
  text "NC" at 797.15,647.68 h35 r90
  text "NC" at 896.83,647.68 h35 r90
  text "NC" at 996.52,647.68 h35 r90
  text "NC" at 1950.55,647.68 h35 r90
  text "NC" at 2050.53,647.68 h35 r90
  text "NC" at 2150.51,647.68 h35 r90
  text "TS0" at 398.4,343.19 h35 r90
  text "TS2" at 498.09,343.19 h35 r90
  text "TS4" at 597.77,343.19 h35 r90
  text "TS6" at 697.46,343.19 h35 r90
  text "NC" at 797.15,343.19 h35 r90
  text "NC" at 896.83,343.19 h35 r90
  text "NC" at 996.52,343.19 h35 r90
  text "PB0" at 1350.68,343.19 h35 r90
  text "PB1" at 1450.66,343.19 h35 r90
  text "PB3" at 1550.63,343.19 h35 r90
  text "PA0" at 1650.61,343.19 h35 r90
  text "PA3" at 1750.59,343.19 h35 r90
  text "PC5" at 1850.57,343.19 h35 r90
  text "NC" at 1950.55,343.19 h35 r90
  text "NC" at 2050.53,343.19 h35 r90
  text "NC" at 2150.51,343.19 h35 r90
  text "GND" at 2250.48,343.19 h35 r90
Mechanical 1:
  the board outline again, w10

## Text inside footprints (layer, text, board x,y; h text height)
D1: Top Overlay "+" at 768.4,1608.6 h40 r90